# Altium PCB DMG_Control_PanelV2.PcbDoc (part 2 of 2)
Units mm, origin at the board's own origin, x right, y up, seen from the top; angles counter-clockwise.
Board outline 81.28 x 71.72 mm, 2 copper layers (Top, Bottom), stack 1.572 mm thick; 117 components, 107 nets, 413 pads, 81 vias.
Unrouted connection lines stored in the file: 2.
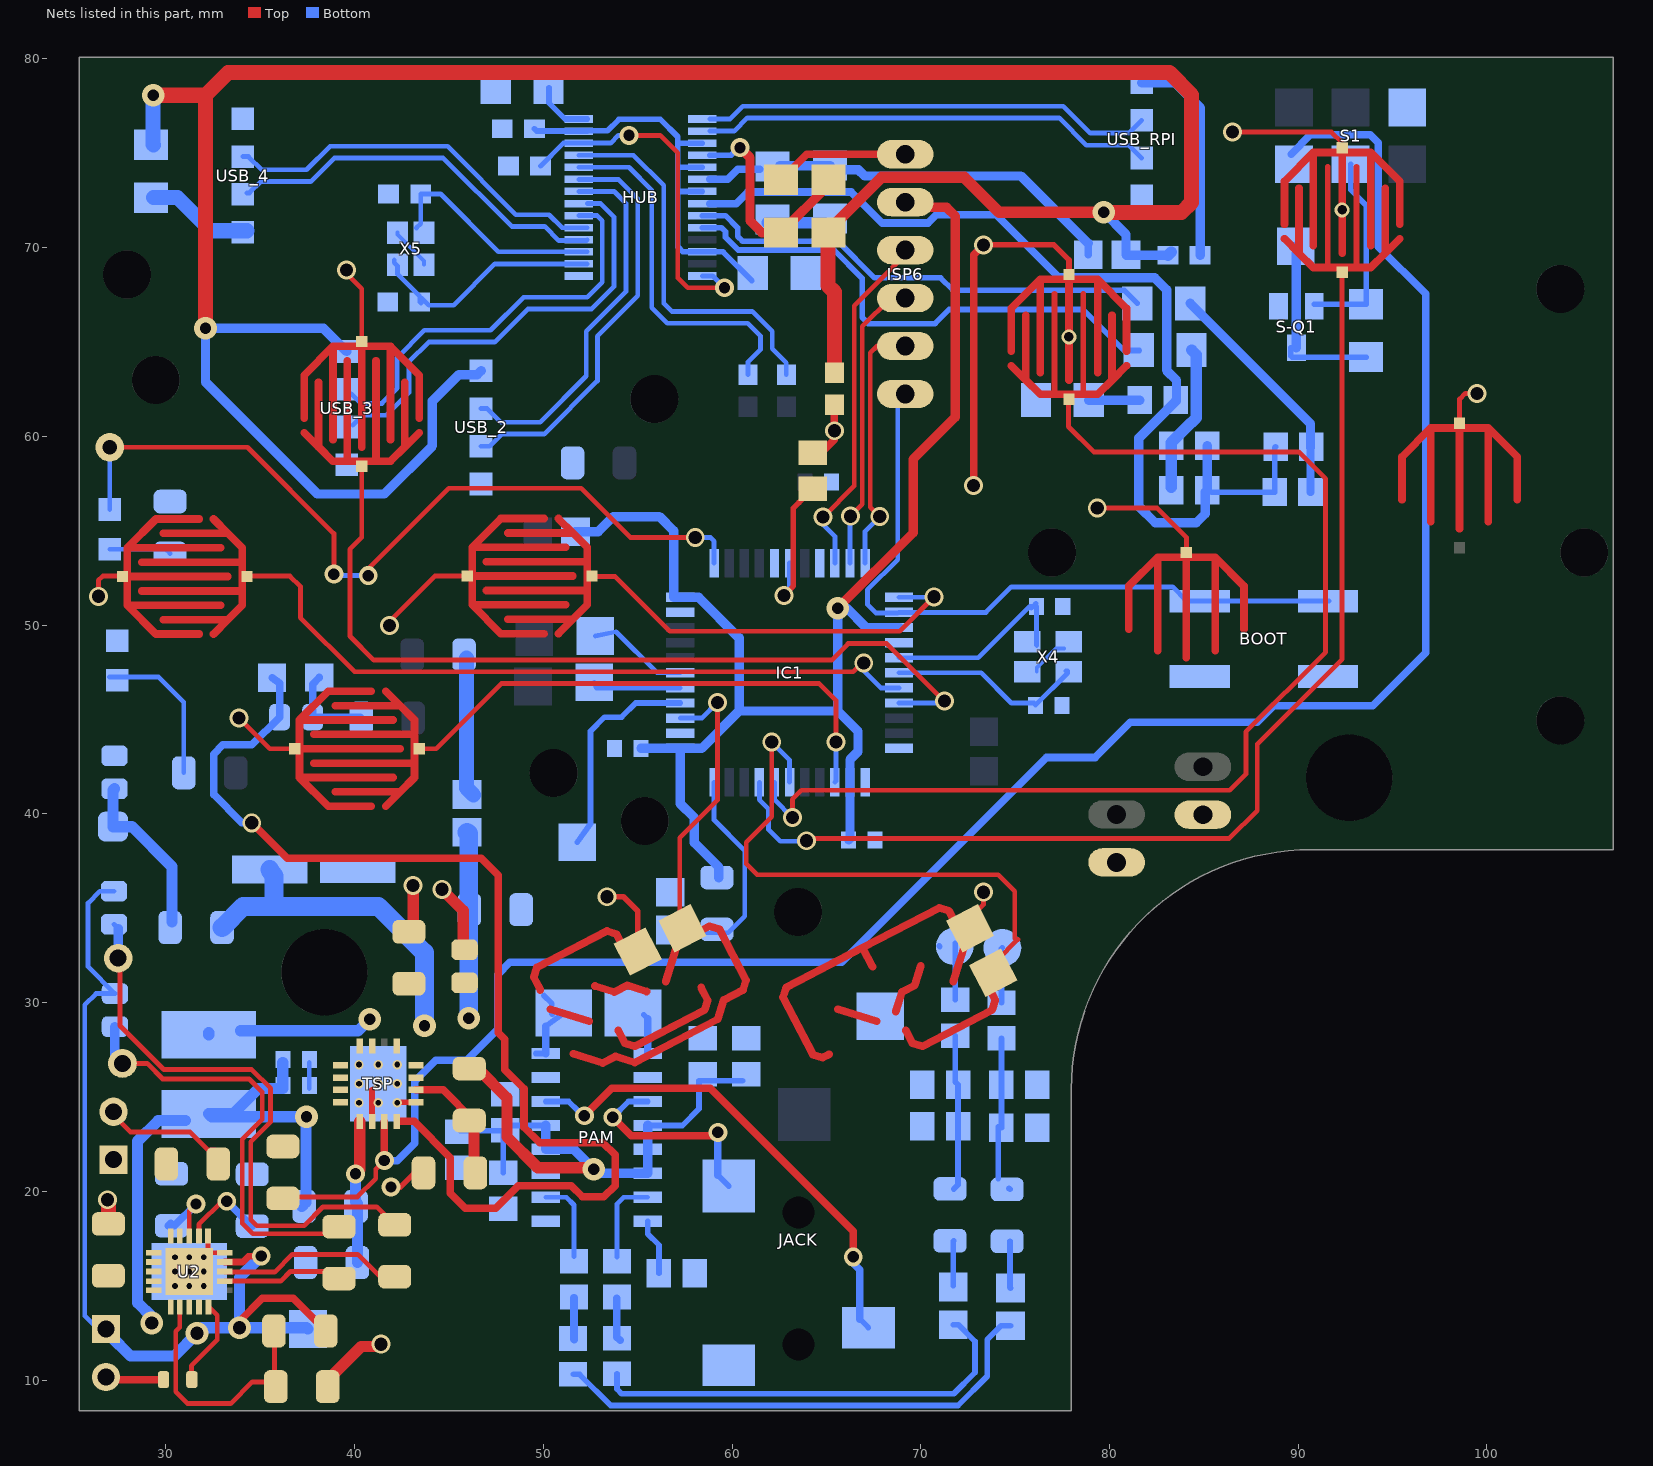
[diagram p2: the nets of this part, all layers, seen from the top]

## Via types
v1: diameter 1, hole 0.7, Top to Bottom, 34 vias
v2: diameter 0.5, hole 0.3, Top to Bottom, 18 vias
v3: diameter 1, hole 0.6, Top to Bottom, 15 vias
v4: diameter 1.2, hole 0.6, Top to Bottom, 9 vias
v5: diameter 1.2, hole 0.7, Top to Bottom, 3 vias
v6: diameter 0.8, hole 0.5, Top to Bottom, 2 vias

## Nets (pads, with @x,y where several pads share a name; then routed paths per layer and width w, separated by ;. In a path a pad name is that pad's centre, name@x,y a point inside that pad or via, vN(x,y) a via of type N, cw(c..) or ccw(c..) an arc to the next point about the centre after c; other vN are vias at no path point) (continued)
DOWN: DOWN1.2 IC1.25 | length 28.2
  Top w0.254: DOWN1.2@43.427,43.45 44.325,43.45 47.775,46.9 64.625,46.9 65.5,46.025 v1(65.5,43.8)
  Bottom w0.254: IC1.25@65.45,41.675 65.5,41.725 v1(65.5,43.8)
DRV: 1.1 2.1 3.2 4.2 5.1 HUB.22 | length 53.2
  Bottom w0.3: 4.2@85.178,57.156 85.425,57.05 3.2@88.75,57.05 88.75,59.4 1.1@88.8,59.45
  Bottom w0.4: HUB.22@58.825,72.34 60.215,72.34 60.825,72.95 66.326,72.95 67.968,71.308 70.382,71.308 70.824,71.75 74,71.75 77.35,68.4
  Bottom w0.5: 77.35,68.4 82.4,68.4 83.025,67.775 83.025,63.5 83.55,62.975 5.1@83.55,61.875 ; 5.1@83.5,61.925 83.5,61.856 81.56,59.915 81.56,56.29 82.425,55.425 84.6,55.425 85.075,55.9 85.075,57.053 4.2@85.175,57.153 ; 2.1@85.175,59.5 4.2@85.175,57.153 ; 4.2@85.178,57.156 4.2@85.175,57.153
GND: +USB-.2 A1.1 B2.1 BOOT.B BOOT.B' ButtonL1.1 ButtonR1.1 C1.2 C2.1 C3.1 C4.2 C6.2 C7.2 C8.2 C9.2 C10.2 C11.2 C12.2 C13.2 C14.2 C15.2 C17.1 C18.2 C20.1 C21.1 C22.1 C23.1 C25.2 C26.1 C27.2 C28.1 C29.2 C30.1 C31.1 C32.2 C35.2 C38.1 DOWN1.1 HUB.1 IC1.5 IC1.15 IC1.23 IC1.35 IC1.43 ISP6.1 JACK.1 LED2.2 LEFT1.1 LIPO.2 pad.8 pad.20 pad.21@67.85,29.275 PAM.2 PAM.9 PAM.11 PAM.15 PWR.C R5.2 R7.1 R9.1 R14.1 R16.1 R20.2 R21.1 R22.1 R26.1 R27.2 R28.1 RIGHT1.1 S-Q1.1 SELECT1.1 SJ1.2 START1.1 THR.1 TSP.5 TSP.6 TSP.7 TSP.10 TSP.13 U2.10 U2.11 U2.21 UP1.1 USB_2.4 USB_3.4 USB_4.4 USB_RPI.4 X2.1 X4.2 X4.4 X5.2 X5.4 Y1.1 | length 101.1
  Top w0.254: v1(26.425,51.525) 26.425,52.375 26.65,52.6 LEFT1.1@27.698,52.6 ; LIPO.2@27.225,24.04 28.115,23.15 31.275,23.15 32.225,22.2 C11.2@32.6,22.2 ; U2.11@32.233,17.628 32.233,16.739 U2.10@33.122,16.738 ; v1(33.875,45.075) 35.5,43.45 DOWN1.1@36.823,43.45 ; v1(39.575,68.825) 39.575,68.625 40.375,67.825 UP1.1@40.375,65.027 ; v1(41.85,49.975) 41.85,50.2 44.25,52.6 RIGHT1.1@46.227,52.6 ; C17.1@65.1,61.675 C17.1@65.425,61.35 ; START1.1@72.613,33.94 72.613,34.488 73.325,35.2 v1(73.325,35.85) ; v1(79.35,56.2) 82.525,56.2 84.075,54.65 B2.1@84.075,53.852 ; v1(86.525,76.125) 91.756,76.125 92.325,75.556 X2.1@92.325,75.302 ; A1.1@98.552,60.702 98.552,61.977 98.85,62.275 v1(99.475,62.275)
  Top w0.3: TSP.10@40.925,23.7 40.925,25.375 ; v3(41.925,20.225) 42.425,20.225 43.175,20.975 R9.1@43.65,20.975 ; v2@42.225,24.725 TSP.13@43.25,24.725 ; v1(53.37,35.605) 54.245,35.605 55.007,34.843 SELECT1.1@55.007,32.708 ; v1(73.325,70.15) 77.05,70.15 77.85,69.35 Y1.1@77.85,68.577
  Top w0.4: +USB-.2@27.051,10.16 27.186,10.025 THR.1@29.875,10.025 ; R14.1@62.6,73.6 63.95,74.95 ISP6.1@69.175,74.95 ; C26.1@64.7,59.1 65.425,59.825 v1(65.425,60.3) C17.1@65.425,61.35 ; v1(72.8,57.4) 72.8,69.625 v1(73.325,70.15)
  Top w0.6: R20.2@38.5,9.925 40.35,11.775 41.275,11.775 v1(41.4,11.9) ; C13.2@42.75,33.675 43.1,34.025 v1(43.1,36.2) ; v1(44.625,36) 45.75,34.875 45.75,33 C12.2@46,32.75
  Top w0.8: C10.2@26.95,18.25 v1@26.95,19.5
  Bottom w0.2: X5.4@42.275,70.8 42.275,70.693 43.675,69.293 X5.2@43.675,69.1 ; X4.2@76.15,47.525 76.15,47.75 77.166,48.766 X4.4@77.584,48.766
  Bottom w0.254: C9.2@37.6,25.45 C8.2@37.6,26.825
  Bottom w0.6: C21.1@61.85,71.325 C22.1@64.9,71.325
  other v1: 26.9,19.55
  other v2: 30.48,14.986 31.242,14.986 32.004,14.986 30.48,15.748 31.242,15.748 32.004,15.748 30.48,16.51 31.242,16.51 32.004,16.51 40.234,24.684 41.25,24.684 42.266,24.684 40.234,25.7 41.25,25.7 42.266,25.7 40.234,26.716 41.25,26.716 42.266,26.716
  other v6: 77.85,65.275 92.325,72
INL: pad.15@71.8,32.975 R29.1 | length 3
  Bottom w0.3: pad.15@70.975,33 pad.15@71,32.975 ; R29.1@71.827,30.148 pad.15@71.827,33.148
INR: pad.15@74.325,32.9 R30.1 | length 2.9
  Bottom w0.3: R30.1@74.275,30 74.275,32.85 pad.15@74.325,32.9
LED1: HUB.23 R25.1 | length 25.2
  Bottom w0.3: HUB.23@58.425,71.7 59.65,71.7 60.3,71.05 60.3,70.6 60.55,70.35 65.6,70.35 67.55,68.4 71.05,68.4 71.7,67.75 80.775,67.75 R25.1@81.475,67.05
LED2: HUB.24 R24.1 | length 27.9
  Bottom w0.3: HUB.24@58.425,71.06 59.44,71.06 59.65,70.85 59.65,70.55 60.325,69.875 65.4,69.875 66.9,68.375 66.9,66.3 67.225,65.975 70.75,65.975 71.5,66.725 78.6,66.725 80.775,64.55 R24.1@81.575,64.55
LEFT: IC1.18 LEFT1.2 | length 39
  Top w0.254: LEFT1.2@34.302,52.6 36.575,52.6 37.125,52.05 37.125,50.4 40,47.525 66.413,47.525 v1@66.888,48 ; v1(66.975,48) 66.8,48 v1@67.025,47.775
  Bottom w0.254: v1(66.975,48) 66.975,47.575 67.875,46.675 IC1.18@68.85,46.675
MISO: IC1.11 ISP6.5 | length 13.7
  Top w0.254: v1(67.825,55.75) 67.325,56.25 67.325,64.425 67.69,64.79 ISP6.5@69.175,64.79
  Bottom w0.254: IC1.11@67.05,53.275 67.05,54.975 v1(67.825,55.75)
MOSI: IC1.10 ISP6.4 | length 15.7
  Top w0.254: v1(66.275,55.775) 66.9,56.4 66.9,65.825 68.405,67.33 ISP6.4@69.175,67.33
  Bottom w0.254: IC1.10@66.25,53.275 v1@66.25,55.75
Net1_2: 1.2 3.1 R25.2 | length 12.6
  Bottom w0.4: 3.1@90.65,57.05 1.2@90.65,59.4
  Bottom w0.5: R25.2@84.275,67.05 90.65,60.675 1.2@90.65,59.4
Net1AMP_1: 1AMP.1 USB_RPI.1 | length 11.5
  Bottom w0.5: USB_RPI.1@81.7,78.75 83.475,78.75 84.8,77.425 1AMP.1@84.8,69.6
Net1AMP_2: 1AMP.2 C17.2 C24.2 R13.2 SJ3.2@80.875,69.625 USB_2.1 USB_3.1 | length 143
  Top w0.6: R13.2@65,70.8 67.925,73.725 72.3,73.725 74.15,71.875 v4(79.7,71.875)
  Top w0.8: v4(29.325,78.075) 32.1,78.075 ; v4(32.1,65.725) 32.1,78.075 ; R13.2@65,70.8 65.075,70.725 65.075,68 65.425,67.65 C17.2@65.425,63.375 ; v4(79.7,71.875) 83.825,71.875 84.35,72.4 84.35,78.1 83.175,79.275 33.3,79.275 32.1,78.075
  Bottom w0.5: USB_3.1@39.575,64.5 38.35,65.725 v4(32.1,65.725) 32.1,62.875 38.025,56.95 41.575,56.95 44.125,59.5 44.125,61.875 45.525,63.275 46.5,63.275 USB_2.1@46.7,63.475 ; v4(79.7,71.875) 80.875,70.7 SJ3.2@80.875,69.625 80.9,69.6 1AMP.2@83.1,69.6
  Bottom w0.6: 1AMP.2@83.1,69.6 1AMP.2@83.275,69.775
  Bottom w0.8: v4(29.325,78.075) 29.325,75.475 C24.2@29.35,75.45
Net2_2: 2.2 4.1 R24.2 | length 7.9
  Bottom w0.6: 4.1@83.275,57.3 2.2@83.275,59.5 83.275,59.673 84.325,60.723 84.337,60.723 84.602,60.988 84.602,64.323 R24.2@84.35,64.575
Net5_2: 5.2 R26.2 | length 2.7
  Bottom w0.5: R26.2@78.9,61.925 5.2@81.6,61.925
Net5V_2: Bost-At.1 C12.1 C13.1 C25.1 C27.1 C28.2 C29.1 C30.2 C31.2 pad.7 PAM.4 PAM.5 PAM.6 PAM.12 PAM.13 R8.2 R11.1 TSP.1 TSP.15 TSP.16 | length 61.3
  Top w0.6: R8.2@46.075,26.5 46.525,26.5 48.075,24.95 48.075,22.875 49.7,21.25 52.6,21.25 v4(52.675,21.175)
  Bottom w0.3: C28.2@45.6,23.217 C27.1@47.95,23.217 ; C31.2@47.875,20.975 47.875,23.142 C27.1@47.95,23.217 ; PAM.13@50.125,23.49 48.223,23.49 C27.1@47.975,23.242 C27.1@47.95,23.217 ; PAM.4@55.525,23.49 57.365,23.49 58.25,24.375 58.25,25.85 C29.1@60.55,25.85
  Bottom w0.5: PAM.13@50.125,23.49 PAM.12@50.125,22.22 51.63,22.22 v4(52.675,21.175) 52.9,20.95 PAM.6@55.525,20.95 PAM.5@55.525,22.22 PAM.4@55.525,23.49
  Bottom w1: R11.1@32.975,33.975 34.1,35.1 35.725,35.1 ; pad.7@35.5,37.05 35.725,36.7 35.725,35.1 ; v4(43.7,28.775) 43.7,32.65 41.25,35.1 35.725,35.1 ; Bost-At.1@45.95,39.025 Bost-At.1@46.025,38.95 ; v4(46.05,29.175) 46.05,34.6 Bost-At.1@46.05,38.75
NetBost-At_2: Bost-At.2 L2.1 | length 7.4
  Bottom w0.8: L2.1@45.925,48.25 45.925,41.375 Bost-At.2@46.3,41
NetC2_2: C2.2 IC1.17 X4.1 | length 10.4
  Bottom w0.254: IC1.17@68.85,47.475 73.2,47.475 74.8,45.875 C2.2@76,45.875 ; C2.2@76.075,45.75 77.775,47.45 77.775,47.575 X4.1@77.7,47.575
NetC3_2: C3.2 IC1.16 X4.3 | length 10.8
  Bottom w0.254: IC1.16@68.85,48.275 73.05,48.275 75.775,51 C3.2@75.95,51 ; C3.2@75.85,50.9 C3.2@75.95,51 ; C3.2@76.1,51.15 C3.2@75.95,51 ; X4.3@76.15,48.925 76.125,48.95 C3.2@76.125,51 C3.2@75.95,51
NetC5_1: 
NetC14_1: C14.1 HUB.2 X5.3 | length 13
  Bottom w0.254: X5.3@42.1,69.35 42.1,69.205 42.277,69.027 42.277,68.6 43.45,67.428 C14.1@43.45,67.125 ; C14.1@43.5,67.35 C14.1@43.525,67.35 ; C14.1@43.525,67.075 C14.1@43.525,67.35 ; HUB.2@52.325,69.14 47.437,69.14 45.247,66.95 43.925,66.95 C14.1@43.525,67.35
NetC16_1: 
NetC19_1: 
NetC20_2: C20.2 HUB.3 X5.1 | length 12
  Bottom w0.254: X5.1@43.275,71.05 43.5,71.275 C20.2@43.5,72.85 44.55,72.85 47.62,69.78 HUB.3@52.325,69.78
NetC21_2: C21.2 C22.2 HUB.20 SJ3.1@78.875,69.625 | length 21.9
  Bottom w0.4: HUB.20@58.825,73.62 59.77,73.62 60.3,74.15 C21.2@61.475,74.15 ; SJ3.1@78.875,69.625 SJ3.1@78.875,70.225
  Bottom w0.5: C21.2@62.525,74.35 C22.2@65.2,74.35 ; C22.2@64.825,74.25 C22.2@64.95,74.125 ; C22.2@64.9,74.125 C22.2@64.95,74.125 ; SJ3.1@78.875,70.225 75.302,73.798 67.948,73.798 67.027,73.798 66.7,74.125 C22.2@64.95,74.125
NetC24_1: C24.1 USB_4.1 | length 5.7
  Bottom w0.8: C24.1@29.35,72.65 30.625,72.65 32.375,70.9 USB_4.1@34.3,70.9
NetC26_2: C26.2 IC1.6 | length 8.1
  Top w0.3: v1(62.75,51.575) 63.25,52.075 63.25,56.2 63.55,56.5 C26.2@64.275,57.225
  Bottom w0.3: v1(62.75,51.575) 63.05,51.875 IC1.6@63.05,53.275
NetC32_1: C32.1 PAM.8 | length 3
  Bottom w0.3: PAM.8@55.525,18.41 55.525,17.75 56.125,17.15 C32.1@56.125,15.65
NetC33_1: C33.1 C36.2 SJ3.1@71.725,12.925 SJ3.2@71.725,14.925 | length 25.9
  Bottom w0.3: C33.1@53.9,10.325 53.9,9.525 54.15,9.275 71.75,9.275 72.875,10.4 72.875,12.05 72,12.925 SJ3.1@71.725,12.925 ; SJ3.2@71.725,15 71.725,17.35 C36.2@71.75,17.375
NetC33_2: C33.2 R15.1 | length 2.3
  Bottom w0.4: R15.1@53.9,14.325 53.9,12.275 C33.2@54.075,12.1
NetC34_1: C34.1 C37.2 SJ3.1@74.75,12.875 SJ3.2@74.75,14.875 | length 29.2
  Bottom w0.3: C34.1@51.6,10.3 51.925,10.3 53.575,8.65 71.975,8.65 73.525,10.2 73.525,12.15 74.25,12.875 SJ3.1@74.75,12.875 ; C37.2@74.725,17.35 74.725,14.9 SJ3.2@74.75,14.875
NetC34_2: C34.2 R23.1 | length 2.2
  Bottom w0.4: R23.1@51.625,14.35 51.625,12.15 C34.2@51.65,12.125
NetC35_1: C35.1 C36.1 R27.1 R29.2 | length 8.3
  Bottom w0.3: C36.1@71.75,20.125 71.975,20.35 R27.1@71.975,23.45 C35.1@71.975,25.65 71.827,25.797 R29.2@71.827,28.248
NetC37_1: C37.1 C38.2 R28.2 R30.2 | length 7.5
  Bottom w0.3: C37.1@74.1,20.675 C38.2@74.1,23.425 ; C38.2@74.275,23.375 R28.2@74.275,25.65 R30.2@74.275,28.1 ; C37.1@74.675,20.15 C37.1@74.725,20.1
NetCHRG/LBO_2: CHRG/LBO.2 pad.3 R17.2 | length 30.8
  Top w0.254: pad.3@27.475,32.35 27.565,32.12 27.565,28.785 29.9,26.45 34.55,26.45 35.55,25.45 35.55,23.675 34.496,22.621 34.496,20.929 34.5,20.925 34.5,18.5 34.825,18.175 37.325,18.175 38.325,19.175 41.175,19.175 R17.2@42.125,18.225
  Bottom w0.254: CHRG/LBO.2@27.25,34.15 CHRG/LBO.2@27.475,33.925
  Bottom w0.5: pad.3@27.475,32.35 CHRG/LBO.2@27.475,33.925
NetDONE_2: DONE.2 pad.2@27.7,26.775 R18.2 | length 23.2
  Top w0.254: pad.2@27.7,26.775 29,26.775 29.825,25.95 34.416,25.95 35.108,25.259 35.108,23.808 34.05,22.75 34.05,18.3 34.6,17.75 39.175,17.75 R18.2@39.375,17.95
  Bottom w0.254: pad.2@27.3,27.175 pad.2@27.7,26.775
  Bottom w0.5: pad.2@27.3,27.175 DONE.2@27.3,28.725
NetHUB_14: HUB.14 R16.2 | length 3.2
  Bottom w0.3: R16.2@50.3,78.475 50.3,77.675 51.155,76.82 HUB.14@52.325,76.82
NetIC1_1: IC1.1 L.A pad.2@27.025,59.425 | length 44.2
  Top w0.254: pad.2@27.025,59.425 34.325,59.425 38.9,54.85 v3(38.9,52.7) ; v3@40.65,52.4 40.65,52.9 45,57.25 52,57.25 54.6,54.65 v1(58.05,54.65)
  Bottom w0.254: L.A@27.025,56.125 pad.2@27.025,59.425 ; v3@38.9,52.575 v3(38.9,52.7) ; v3@38.9,52.625 v3(40.725,52.625) ; v1(58.05,54.65) 58.85,54.65 59.05,54.45 IC1.1@59.05,53.275
NetIC1_33: IC1.33 R4.1 SJ1.1 | length 11.4
  Bottom w0.254: SJ1.1@57.375,33.7 59.8,33.7 60.675,34.575 60.675,38.05 59.05,39.675 IC1.33@59.05,41.675
NetL1_2: L1.2 TSP.3 TSP.4 | length 7.2
  Bottom w0.6: L1.2@32.275,28.296 L1.2@32.275,28.402 ; L1.2@33.95,28.5 40.175,28.5 v4(40.8,29.125)
NetL_C: L.C R5.1 | length 3.3
  Bottom w0.254: L.C@27.025,54.025 30,54.025 R5.1@30.225,53.8
NetLED1_1: 1K.1 OFF.1 pad.4@38.125,47.225 | length 4.8
  Bottom w0.4: pad.4@38.125,47.225 37.775,46.875 OFF.1@37.775,45.125 40.3,45.125 1K.1@40.35,45.075
NetLED2_1: LED2.1 pad.2@27.2,39.325 R11.2 | length 9
  Bottom w0.6: LED2.1@27.275,41.325 27.2,41.25 pad.2@27.2,39.325 28.2,39.325 30.325,37.2 R11.2@30.325,34.275
NetPAM_7: PAM.7 R15.2 | length 4.6
  Bottom w0.254: R15.2@53.9,16.525 53.9,19.325 54.255,19.68 PAM.7@55.525,19.68
NetPAM_10: PAM.10 R23.2 | length 4.4
  Bottom w0.254: PAM.10@50.125,19.68 51.22,19.68 51.625,19.275 R23.2@51.625,16.55
NetPWR_A: PWR.A R3.1 | length 8.2
  Bottom w0.254: PWR.A@27,47.25 29.625,47.25 30.95,45.925 R3.1@30.95,42.175
NetR6_1: R6.1 R7.2 TSP.9 | length 7.6
  Top w0.6: v3(40.05,20.925) 40.275,21.15 TSP.9@40.275,23.7
  Bottom w0.6: v3(40.05,20.925) 40.05,19.45 40.15,19.35 R7.2@40.15,16.225
NetR8_1: R8.1 R9.2 TSP.14 | length 6.6
  Top w0.4: TSP.14@43.25,25.375 44.7,25.375 R8.1@46.325,23.75
  Top w0.6: R8.1@46.325,23.75 46.325,20.95 R9.2@46.35,20.925
NetR10_2: 
NetR12_2: R12.2 S1.1 TSP.11 | length 112
  Top w0.254: R12.2@36.05,19.893 36.243,19.7 40.15,19.7 41.125,20.675 41.125,21.18 v3(41.575,21.63)
  Top w0.4: v3(41.575,21.63) TSP.11@41.575,23.7
  Bottom w0.4: v3(41.575,21.63) 42.255,21.63 43.175,22.55 43.175,25.825 44.3,26.95 45.942,26.95 47.575,28.583 47.575,31.475 48.225,32.125 65.8,32.125 76.663,42.987 79.237,42.987 81.1,44.85 87.825,44.85 88.7,45.725 93.95,45.725 96.75,48.525 96.75,67.55 94.25,70.05 94.25,75.55 93.825,75.975 90.65,75.975 S1.1@89.625,74.95
NetR17_1: R17.1 U2.8 | length 9.5
  Top w0.254: U2.8@33.122,15.748 33.122,15.721 35.771,15.721 36.704,16.654 40.171,16.654 41.35,15.475 R17.1@41.75,15.475
NetR18_1: R18.1 U2.7 | length 5.9
  Top w0.254: U2.7@33.122,15.24 36.09,15.24 36.6,15.75 R18.1@38.8,15.75
NetR19_1: R19.1 R20.1 U2.2 | length 13.5
  Top w0.254: U2.2@30.734,13.868 30.734,12.786 30.525,12.577 30.525,9.375 31.15,8.75 33.425,8.75 34.575,9.9 35.725,9.9 35.75,9.925 R19.1@35.75,12.9
NetR21_2: R21.2 U2.13 | length 3.7
  Top w0.254: U2.13@31.242,17.628 31.242,18.967 v3(31.6,19.325)
  Bottom w0.4: R21.2@30.125,18.175 R21.2@30.252,18.302 ; R21.2@30.379,18.175 30.45,18.175 v3(31.6,19.325)
NetR22_2: R22.2 U2.12 | length 4.5
  Top w0.254: U2.12@31.75,17.628 31.75,18.25 32.975,19.475 v3(33.225,19.475)
  Bottom w0.4: v3(33.225,19.475) 34.55,18.15 R22.2@34.575,18.15
NetS1_2: S1.2 S-Q1.2 S-R1.1 | length 10.5
  Bottom w0.3: S-Q1.2@90.85,67 S-R1.1@93.6,67 93.6,72.25 92.775,73.075 S1.2@92.775,74.425
NetS1_6: S1.6
NetS-D1_1: 
NetS-Q1_3: pad.21@89.875,70.075 S-Q1.3 S-R1.2 | length 9.8
  Bottom w0.3: S-Q1.3@89.6,64.7 89.6,64.275 89.675,64.2 S-R1.2@93.6,64.2
  Bottom w0.5: pad.21@89.875,70.075 89.9,70.05 S-Q1.3@89.9,64.7
NetS-R2_1: OFF.2 pad.4@35.625,47.205 TSP.12 | length 62.1
  Top w0.4: v1(34.55,39.525) 36.425,37.65 46.7,37.65 47.6,36.75 47.6,28.4 47.95,28.05 47.95,26.45 48.975,25.425 48.975,23.4 49.8,22.575 53.15,22.575 53.8,21.925 53.8,20.3 53.2,19.7 52.075,19.7 51.475,20.3 48.675,20.3 47.475,19.1 45.875,19.1 45.075,19.9 45.075,21.775 43.15,23.7 TSP.12@42.275,23.7
  Bottom w0.4: v1(34.55,39.525) 34.027,39.525 32.525,41.027 32.525,43.15 33.025,43.65 34.55,43.65 OFF.2@36.025,45.125 36.025,46.925 pad.4@35.625,47.205
NetTHR_2: THR.2 U2.5 | length 4.5
  Top w0.254: THR.2@31.35,10.3 31.35,10.75 32.725,12.125 32.725,13.427 32.25,13.902 U2.5@32.25,14.025
OUTL+: pad.19 PAM.1 | length 2.1
  Bottom w0.3: pad.19@55.325,29.35 pad.19@55.525,29.15
  Bottom w0.4: PAM.1@55.525,27.3 pad.19@55.525,29.15
OUTL-: JACK.2 PAM.3 | length 11.3
  Top w0.3: v3@59.075,22.95 v3(59.25,23.125)
  Top w0.4: v3(53.675,23.925) 54.65,22.95 v3@59.075,22.95
  Bottom w0.3: v3(53.675,23.925) 54.51,24.76 PAM.3@55.525,24.76 ; JACK.2@59.25,20.85 JACK.2@59.825,20.275
  Bottom w0.4: JACK.2@59.25,20.85 v3(59.25,23.125)
OUTR+: pad.16 PAM.16 | length 4.4
  Bottom w0.3: PAM.16@49.591,27.3 PAM.16@50.125,27.3 ; pad.16@50.025,30.375 50.45,29.95 50.45,29.4 pad.16@50.475,29.375 ; pad.16@50.125,28.75 pad.16@51.075,29.45
  Bottom w0.4: PAM.16@50.125,27.3 pad.16@50.125,28.75
OUTR-: JACK.3 PAM.14 | length 25.3
  Top w0.4: v3(52.175,24) 53.625,25.45 58.85,25.45 66.425,17.875 v3(66.425,16.525)
  Bottom w0.3: PAM.14@50.125,24.76 51.34,24.76 v3@51.825,24.275 ; v3@66.425,16.2 v3(66.425,16.525) ; JACK.3@66.775,13.225 JACK.3@67.225,12.775
  Bottom w0.4: v3@66.425,16.2 66.775,15.85 JACK.3@66.775,13.225
OUTUSB_N: HUB.15 USB_RPI.2 | length 24
  Bottom w0.254: HUB.15@58.825,76.82 59.895,76.82 60.575,77.5 77.55,77.5 78.975,76.075 81.025,76.075 USB_RPI.2@81.7,76.75
OUTUSB_P: HUB.16 USB_RPI.3 | length 24
  Bottom w0.254: HUB.16@58.825,76.18 60.105,76.18 60.8,76.875 77.325,76.875 78.775,75.425 81.025,75.425 USB_RPI.3@81.7,74.75
RIGHT: IC1.12 RIGHT1.2 | length 21.9
  Top w0.254: RIGHT1.2@52.577,52.575 53.8,52.575 56.7,49.675 68.875,49.675 v1(70.7,51.5)
  Bottom w0.254: IC1.12@68.85,51.475 v1@70.675,51.475
  Bottom w0.406: v1@70.675,51.475 v1(70.7,51.5)
RST: BOOT.A BOOT.A' IC1.13 ISP6.6 | length 37.1
  Bottom w0.254: ISP6.6@68.425,61.95 68.775,61.6 68.775,53.475 67.175,51.875 67.175,51.1 67.625,50.65 IC1.13@68.775,50.65 ; IC1.13@68.85,50.675 73.45,50.675 74.8,52.025 83.35,52.025 84.1,51.275 BOOT.A'@91.625,51.275
RXLED: IC1.8
SCK: IC1.9 ISP6.3 | length 19.9
  Top w0.254: v1@64.675,55.875 v1(64.825,55.725) 66.475,57.375 66.475,66.925 ISP6.3@69.297,69.748
  Bottom w0.254: v1(64.825,55.725) 64.825,55.325 65.45,54.7 IC1.9@65.45,53.275 ; ISP6.3@68.32,69.595 ISP6.3@69.425,69.595
SELECT: IC1.36 SELECT1.2 | length 15.6
  Top w0.254: SELECT1.2@57.373,33.94 SELECT1.2@57.373,34.327 ; SELECT1.2@57.5,33.95 57.225,34.225 57.225,38.725 59.225,40.725 v1(59.225,45.9)
  Bottom w0.254: IC1.36@57.25,45.075 58.4,45.075 v1(59.225,45.9)
START: IC1.28 START1.2 | length 29.1
  Top w0.254: v1(62.1,43.8) 62.1,39.85 60.75,38.5 60.75,37.35 61.325,36.775 74.1,36.775 74.975,35.9 74.975,33.4 ; START1.2@74.019,31.524 74.019,32.219 75.15,33.35
  Bottom w0.254: v1(62.1,43.8) 63.05,42.85 IC1.28@63.05,41.675
TXLED: IC1.22
UP: IC1.19 UP1.2 | length 45.4
  Top w0.254: UP1.2@40.375,58.423 40.375,54.65 39.75,54.025 39.75,49.425 41.025,48.15 65.275,48.15 66.15,49.025 68.2,49.025 v1(71.25,45.975)
  Bottom w0.254: IC1.19@68.85,45.875 71.15,45.875 v1(71.25,45.975)
USB1_N: HUB.10 R1.1 | length 19.3
  Bottom w0.254: HUB.10@51.875,74.26 54.54,74.26 55.75,73.05 55.75,66.825 56.575,66 60.825,66 61.5,65.325 61.5,64.597 60.85,63.947 R1.1@60.85,63.27
USB1_P: HUB.11 R2.1 | length 20.4
  Bottom w0.254: HUB.11@51.875,74.9 54.775,74.9 56.375,73.3 56.375,67.05 56.8,66.625 61.075,66.625 62.125,65.575 62.125,64.65 62.875,63.9 R2.1@62.875,63.27
USB2_N: HUB.8 USB_2.2 | length 19.7
  Bottom w0.254: USB_2.2@46.7,61.475 47.025,61.475 47.75,60.75 49.825,60.75 52.275,63.2 52.275,65.575 54.375,67.675 54.375,72.35 53.745,72.98 HUB.8@51.875,72.98
USB2_P: HUB.9 USB_2.3 | length 21.7
  Bottom w0.254: USB_2.3@46.7,59.475 47.15,59.475 47.8,60.125 50.05,60.125 52.863,62.938 52.863,65.313 55,67.45 55,72.6 53.98,73.62 HUB.9@51.875,73.62
USB3_N: HUB.6 USB_3.2 | length 21.7
  Bottom w0.254: USB_3.2@39.825,62.25 40.325,61.75 41.45,61.75 42.25,62.55 42.25,64.175 43.7,65.625 47.2,65.625 48.95,67.375 52.325,67.375 53.125,68.175 53.125,71.425 52.85,71.7 HUB.6@51.875,71.7
USB3_P: HUB.7 USB_3.3 | length 23.2
  Bottom w0.254: USB_3.3@39.9,60.6 40.425,61.125 41.675,61.125 42.875,62.325 42.875,63.95 43.925,65 47.425,65 49.175,66.75 52.55,66.75 53.75,67.95 53.75,71.625 53.035,72.34 HUB.7@52.325,72.34
USB4_N: HUB.4 USB_4.2 | length 20.6
  Bottom w0.254: USB_4.2@34.3,72.9 34.425,72.9 35.025,73.5 37.675,73.5 38.925,74.75 44.7,74.75 48.325,71.125 50.075,71.125 50.825,70.375 52.28,70.375 HUB.4@52.325,70.42
USB4_P: HUB.5 USB_4.3 | length 20.8
  Bottom w0.254: USB_4.3@34.075,74.825 34.375,74.825 35.075,74.125 37.45,74.125 38.7,75.375 44.925,75.375 48.55,71.75 50.3,71.75 50.99,71.06 HUB.5@51.875,71.06 HUB.5@52.325,71.06
VBAT: C8.1 C9.1 L1.1 R6.2 R12.1 TSP.8 U2.1 U2.20 | length 28.9
  Bottom w0.6: v5(29.25,13.025) 29.25,13.35 28.5,14.1 28.5,22.65 29.6,23.75 L1.1@31.025,23.75 ; C8.1@36.2,26.825 36.2,25.45 34.9,25.45 33.554,24.104 L1.1@32.275,24.104 32.429,23.95 v4(37.45,23.95) 37.425,23.925 37.425,19.425 R6.2@37.2,19.2
VBUS: +USB-.1 C10.1 CHRG/LBO.1 DONE.1 pad.4@37.525,12.7 R19.2 U2.3 U2.4 U2.9 U2.17 U2.18 U2.19 | length 51.1
  Top w0.3: R19.2@38.5,12.9 R19.2@38.575,12.9
  Top w0.35: U2.9@33.122,16.256 34.081,16.256 34.375,16.55 v3@34.875,16.55
  Top w0.4: v5(33.9,12.775) 33.9,13.125 35.1,14.325 36.75,14.325 R19.2@38.175,12.9
  Top w0.6: R19.2@38.175,12.9 R19.2@38.5,12.9
  Bottom w0.254: +USB-.1@27.025,12.925 26.175,12.925 25.7,13.4 25.7,29.875 26.3,30.475 DONE.1@27.3,30.475 25.875,31.9 25.875,35.275 26.5,35.9 CHRG/LBO.1@27.25,35.9
  Bottom w0.6: +USB-.1@27.051,12.7 27.051,12.349 28.125,11.275 30.45,11.275 v5(31.65,12.475) 31.95,12.775 v5(33.9,12.775) ; v3(35.05,16.575) 33.9,15.425 v5(33.9,12.775) ; pad.4@37.525,12.7 37.45,12.775 v5(33.9,12.775)
VBUSM: HUB.18 R13.1 R14.2 | length 11.7
  Top w0.5: v3(60.425,75.3) 60.95,74.775 60.95,71.425 61.575,70.8 R14.2@62.6,70.8 65.1,73.3 R13.1@65.1,73.6
  Bottom w0.3: HUB.18@58.825,74.9 59.95,74.9 v3@60.475,75.425
VCC: C6.1 C7.1 IC1.14 IC1.24 IC1.34 IC1.44 ISP6.2 R4.2 SJ2.1 | length 79.1
  Top w0.5: v4(65.6,50.9) 69.6,54.9 69.6,58.8 71.825,61.025 71.825,71.675 71.365,72.135 ISP6.2@69.425,72.135
  Bottom w0.5: SJ2.1@51.7,54.95 52.9,54.95 53.7,55.75 56.15,55.75 56.9,55 56.9,51.475 58.225,51.475 60.375,49.325 60.375,45.45 ; C7.1@55.175,43.475 IC1.34@57.25,43.475 ; R4.2@59.3,36.625 59.3,37.175 58,38.475 58,39.8 57.25,40.55 IC1.34@57.25,43.475 ; C6.1@66.175,38.625 66.25,38.7 IC1.24@66.25,41.675 66.25,42.875 66.675,43.3 66.675,44.375 65.6,45.45 ; IC1.14@68.85,49.875 67.1,49.875 66.075,50.9 v4(65.6,50.9) 65.6,45.45 ; IC1.34@57.25,43.475 58.4,43.475 60.375,45.45 ; 60.375,45.45 65.6,45.45
VCC1_8: C15.1 HUB.12 HUB.28 | length 19.1
  Top w0.254: v3(54.538,75.95) 56.2,75.95 57.125,75.025 57.125,68.4 57.65,67.875 v3(59.6,67.875)
  Bottom w0.254: C15.1@49.85,74.325 51.065,75.54 HUB.12@51.875,75.54 53.565,75.54 53.975,75.95 v3(54.538,75.95) ; HUB.28@58.425,68.5 58.975,68.5 v3(59.6,67.875)
VCC3_3: C18.1 C23.2 HUB.13 HUB.17 HUB.19 HUB.21 HUB.26 | length 22.8
  Bottom w0.3: C23.2@49.525,76.3 49.645,76.18 52.325,76.18 52.345,76.2 53.4,76.2 54,76.8 56.2,76.8 57.125,75.875 57.125,75.575 ; HUB.21@58.425,72.98 57.18,72.98 57.125,72.925 ; HUB.19@58.425,74.26 57.21,74.26 57.125,74.175 ; HUB.17@58.425,75.54 57.16,75.54 57.125,75.575 ; C18.1@61.05,68.25 59.52,69.78 HUB.26@58.425,69.78 57.395,69.78 57.125,70.05 57.125,72.925 ; 57.125,72.925 57.125,74.175 ; 57.125,74.175 57.125,75.575
VLIPO: C11.1 LIPO.1 U2.14 U2.15 U2.16
VRX: IC1.39 pad.4@52.75,49.425 | length 5.4
  Bottom w0.254: pad.4@52.75,49.425 53.85,49.65 56.025,47.475 IC1.39@57.25,47.475
VRY: IC1.38 pad.4@52.693,46.975 | length 4.8
  Bottom w0.254: pad.4@52.693,46.975 52.8,46.675 IC1.38@57.25,46.675
X: IC1.30 X2.2 | length 59.9
  Top w0.254: v1@63.95,38.7 86.35,38.7 87.825,40.175 87.825,43.7 92.325,48.2 X2.2@92.325,68.698
  Bottom w0.254: IC1.30@61.45,41.675 61.45,40.75 61.925,40.275 61.925,39.175 62.55,38.55 63.925,38.55 v1(63.95,38.575)
Y: IC1.29 Y1.2 | length 61.4
  Top w0.254: v1(63.2,39.8) 63.2,40.775 63.675,41.25 86.375,41.25 87.225,42.1 87.225,44.35 91.45,48.575 91.45,57.75 90.025,59.175 79.175,59.175 77.825,60.525 Y1.2@77.825,61.973
  Bottom w0.254: IC1.29@62.25,41.675 62.25,40.75 v1(63.2,39.8)
Z: IC1.37 pad.4@51.8,38.5 | length 11.5
  Bottom w0.3: pad.4@51.8,38.5 52.5,39.47 52.5,43.75 52.5,44.375 53.25,45.125 54.15,45.125 54.9,45.875 IC1.37@57.25,45.875
pads on no net: HUB.25 HUB.27 IC1.42 JACK.4 JACK.5 JACK.6 S1.3 S1.4 TSP.2 TSP.17 U2.6

## Polygon pours and split planes (outlines as drawn)
Net5V_2 on Top "TSP" (solid, pour order 2): 41.9,31.875 46.575,31.875 46.9,31.55 46.9,28.225 47.35,27.775 47.35,25.925 47.2,25.85 42.8,25.85 42.8,26.95 42.8,27.275 42.475,27.275 41.9,27.275 41.9,28.8
VBAT on Top "MCP" (solid, remove dead copper, pour order 4): 28.55,14.925 28.55,14.85 28.55,12.1 28.701,11.949 29.975,11.949 30.15,12.16 30.15,12.675 30.425,12.95 30.425,14.425 30,14.425 29.95,14.475 29.85,14.575 29.85,14.925
VBUS on Top "MCP-VBus" (solid, pour order 6): 31.05,14.35 31.05,12.775 30.925,12.575 30.925,12.25 31.225,11.8 31.975,11.8 32.025,11.8 32.35,12.125 32.35,12.9 31.95,13.3 31.95,14.35
VBUS on Top "MCP-VBus" (solid, pour order 8): 29.85,16.411 26.004,16.411 26.05,16.45 25.875,16.3 25.825,16.25 25.825,12.175 25.825,12.125 26.1,11.9 26.15,11.9 27.6,11.9 27.85,11.9 28.1,12.15 28.25,12.3 28.25,14.525 28.25,14.85 28.475,15.075 29.841,15.075
VLIPO on Top "MCP-VBus" (solid, pour order 10): 29.825,16.55 28.65,16.55 28.35,16.85 28.025,17.175 28.025,20.225 25.875,20.225 25.7,20.4 25.7,22.725 25.775,22.8 30.75,22.8 30.925,22.625 30.925,17.15 29.875,17.15 29.825,17.15 29.825,17.1
NetL1_2 on Top "MCP-VBus" (solid, pour order 12): 41.25,28.3 41.25,27.275 39.85,27.275 39.825,27.3 39.8,27.325 39.8,28.55 39.8,29.35 40.6,30.15 41.35,30.15 41.5,30.15 41.7,29.95 41.7,28.646
VBAT on Top "VBAT TSP" (solid, pour order 22): 39.65,24.9 38.55,24.9 36.475,24.9 36.475,24.35 36.475,23.125 35.25,23.125 35.25,21.7 36.275,21.7 37.5,21.7 39.65,21.7 39.65,24
GND on Top "GNDTSP" (solid, pour order 24): 39.993,25.195 39.993,27.1 38.85,27.1 38.85,25.195
GND on Bottom "GNDPLANE" (solid, remove dead copper, pour order 31): 25.4,8.375 78,8.375 78,26 90.1,38.1 106.65,38.1 106.7,38.15 106.7,80.125 25.4,80.125 25.375,80.1

## Keep-outs
Keep-Out Layer:
  lines w0: 77.978,25.4 cw(c90.678,25.4) 90.678,38.1 106.68,38.1

## Other copper
Bottom:
  pour cut-out: 62.475,52.525 60.2,52.525 60.05,52.375 60.05,51.6 60.825,50.825 62.45,50.825 62.45,52.05 62.6,52.2
  pour cut-out: 75.675,15.84 73.25,15.84 70.811,15.84 70.811,12.086 70.811,11.961 75.675,11.961
  pour cut-out: 60.198,60.868 63.527,60.868 63.527,63.973 60.198,63.973
  pour cut-out: 54.919,66.966 55.556,66.966 55.362,67.325 55.16,67.325
  pour cut-out: 60.191,67.598 60.191,66.916 60.1,66.825 59.85,66.825 59.85,67.226 59.929,67.305
  pour cut-out: 82.452,77.502 82.452,73.998 80.948,73.998 80.948,77.502
  pour cut-out: 40.327,63.252 40.327,59.748 38.823,59.748 38.823,63.252
  pour cut-out: 45.948,58.723 45.948,62.227 47.452,62.227 47.452,58.723
  pour cut-out: 52.614,55.864 48.786,55.864 48.786,54.036 52.614,54.036
  pour cut-out: 46.864,41.939 46.864,38.111 45.036,38.111 45.036,41.939
  pour cut-out: 81.789,70.539 78.061,70.539 78.05,70.55 78.05,68.8 81.779,68.8 81.789,68.81
  pour cut-out: 36.752,24.998 36.752,27.577 35.648,27.577 35.625,27.555 35.625,24.975
  pour cut-out: 33.323,75.577 33.323,72.073 34.827,72.073 34.827,75.576
  pour cut-out: 48.3,50.525 48.3,45.598 53.85,45.664 53.85,50.525
  pour cut-out: 73.836,15.789 73.836,12.011 75.614,12.011 75.664,11.961 75.664,15.789

## Silkscreen, mask and mechanical layers (free items; w line width, h text height)
Top Overlay:
  lines w0.254: 27.178,52.578 cw(c30.988,52.578) 30.988,56.388 ; 36.322,43.434 cw(c40.132,43.434) 40.132,47.244 ; 36.576,61.722 cw(c40.386,61.722) 40.386,65.532 ; 45.466,52.705 cw(c49.212,52.642) 49.276,56.388 ; 74.041,65.278 cw(c77.851,65.278) 77.851,69.088 ; 80.264,50.546 cw(c84.074,50.546) 84.074,54.356 ; 88.519,72.009 cw(c92.329,72.009) 92.329,75.819 ; 94.742,57.277 cw(c98.615,57.34) 98.552,61.214
  text "X" at 95.4,75.4 h0.78
  text "Y" at 79.4,69.4 h0.78
  text "A" at 100.4,61.4 h0.78
  text "B" at 87.757,53.848 h0.78
  text "SELECT" at 50.4,33.9 h0.78
  text "START" at 65.9,33.9 h0.78
Bottom Overlay:
  circle w0.406: c27.94,68.58 r2.032
  circle w0.406: c55.88,61.976 r2.032
  circle w0.406: c103.886,44.958 r2.032
  circle w0.406: c103.886,67.818 r2.032
  lines w0.8: 53.725,27.3 54.025,27.3
  text "X" at 95.9,75.4 h0.78
  text "SOFT" at 95.075,69.575 h1
  text "A" at 99.568,62.103 h0.78
  text "Karlicio@gmail.com / @Kelroy" at 101.325,59.925 h1 r90
  text "B" at 86.9,54.4 h0.78
  text "VRX" at 53.975,50.825 h1
  text "A5" at 50.125,50.725 h1
  text "+LED-" at 39.3,48.775 h1
  text "VRY" at 53.875,44.45 h1
  text "A4" at 50.15,44.375 h1
  text "D0" at 70.525,43.775 h1
  text "D1" at 70.65,41.6 h1
  text "GND" at 43.725,38.275 h1.52
  text "5V" at 37.95,38.25 h1.52
  text "PWM1" at 70.15,32.15 h1 r90
  text "PWM0" at 76.775,31.925 h1 r90
  text "R+" at 51.5,31.425 h1.3 r90
  text "L+" at 55.15,31.25 h1.3 r90
  text "V-FINAL" at 42.025,30.125 h1
  text "GND" at 65.95,27.925 h1 r90
  text "L-" at 61.625,20.375 h1.3
  text "R-" at 67.6,14.5 h1.3
  text "VccBus" at 40.15,10.35 h1
  text "LIN2" at 66.95,8.825 h1
  text "RIN2" at 77.625,8.725 h1 r90
Dimension:
  lines w0.1: 25.4,8.382 63.475,8.382 77.978,8.382 77.978,25.4 cw(c90.678,25.4) 90.678,38.1 106.68,38.1 106.68,80.1 25.4,80.1 25.4,8.382
_tsilk:
  text "GND" at 101.346,72.136 h1.08
  text "X" at 97.178,72.098 h0.86
  text "GND" at 31.496,68.58 h1.08
  text "UP" at 39.654,66.4 h0.86
  text "Y" at 82.702,64.828 h0.86
  text "LEFT" at 29.32,57.186 h0.86
  text "RIGHT" at 47.59,57.162 h0.86
  text "A" at 103.448,57.082 h0.86
  text "B" at 88.94,50.082 h0.86
  text "DOWN" at 38.336,48.17 h0.86
  text "GAMEBOY ZERO BUTTON PCB" at 44.9,44.4 h2.76
  text "START" at 65.646,34.408 h0.86
  text "SELECT" at 48.622,34.154 h0.86
122bmp:
  rectangle: 87.249,47.371 89.789,47.428

## Text inside footprints (layer, text, board x,y; h text height)
L: tDocu "C" at 26.925,53.875 h0.39 r180; tDocu "A" at 26.925,56.475 h0.39 r180
PWR: tDocu "C" at 27.525,49.325 h0.39; tDocu "A" at 27.525,46.725 h0.39
S1: Bottom Overlay "1" at 89.521,72.647 h1 r180; Bottom Overlay "2" at 92.315,72.647 h1 r180; Bottom Overlay "3" at 95.617,72.647 h1 r180; Bottom Overlay "4" at 89.521,80.013 h1 r180; Bottom Overlay "5" at 92.569,80.013 h1 r180; Bottom Overlay "6" at 95.617,80.013 h1 r180; Bottom Overlay "SW" at 88.251,76.711 h1 r90
USB_2: Bottom Overlay "GND" at 49.748,57.125 h0.8; Bottom Overlay "D+" at 48.986,59.157 h0.8; Bottom Overlay "D-" at 48.986,61.189 h0.8; Bottom Overlay "VCC" at 49.748,62.967 h0.8
USB_3: Bottom Overlay "GND" at 42.623,58.15 h0.8; Bottom Overlay "D+" at 41.861,60.182 h0.8; Bottom Overlay "D-" at 41.861,62.214 h0.8; Bottom Overlay "VCC" at 42.623,63.992 h0.8
USB_4: Bottom Overlay "GND" at 31.027,77.175 h0.8 r180; Bottom Overlay "D+" at 31.789,75.143 h0.8 r180; Bottom Overlay "D-" at 31.789,73.111 h0.8 r180; Bottom Overlay "VCC" at 31.027,71.333 h0.8 r180
USB_RPI: Bottom Overlay "GND" at 84.748,72.4 h0.8; Bottom Overlay "D+" at 83.986,74.432 h0.8; Bottom Overlay "D-" at 83.986,76.464 h0.8; Bottom Overlay "VCC" at 84.748,78.242 h0.8